# Altium PCB PCB1.PcbDoc
Units mm, origin at the board's own origin, x right, y up, seen from the top; angles counter-clockwise.
Board outline 75.6 x 66.9 mm, 2 copper layers (Top Layer, Bottom Layer); 104 components, 77 nets, 392 pads, 84 vias.
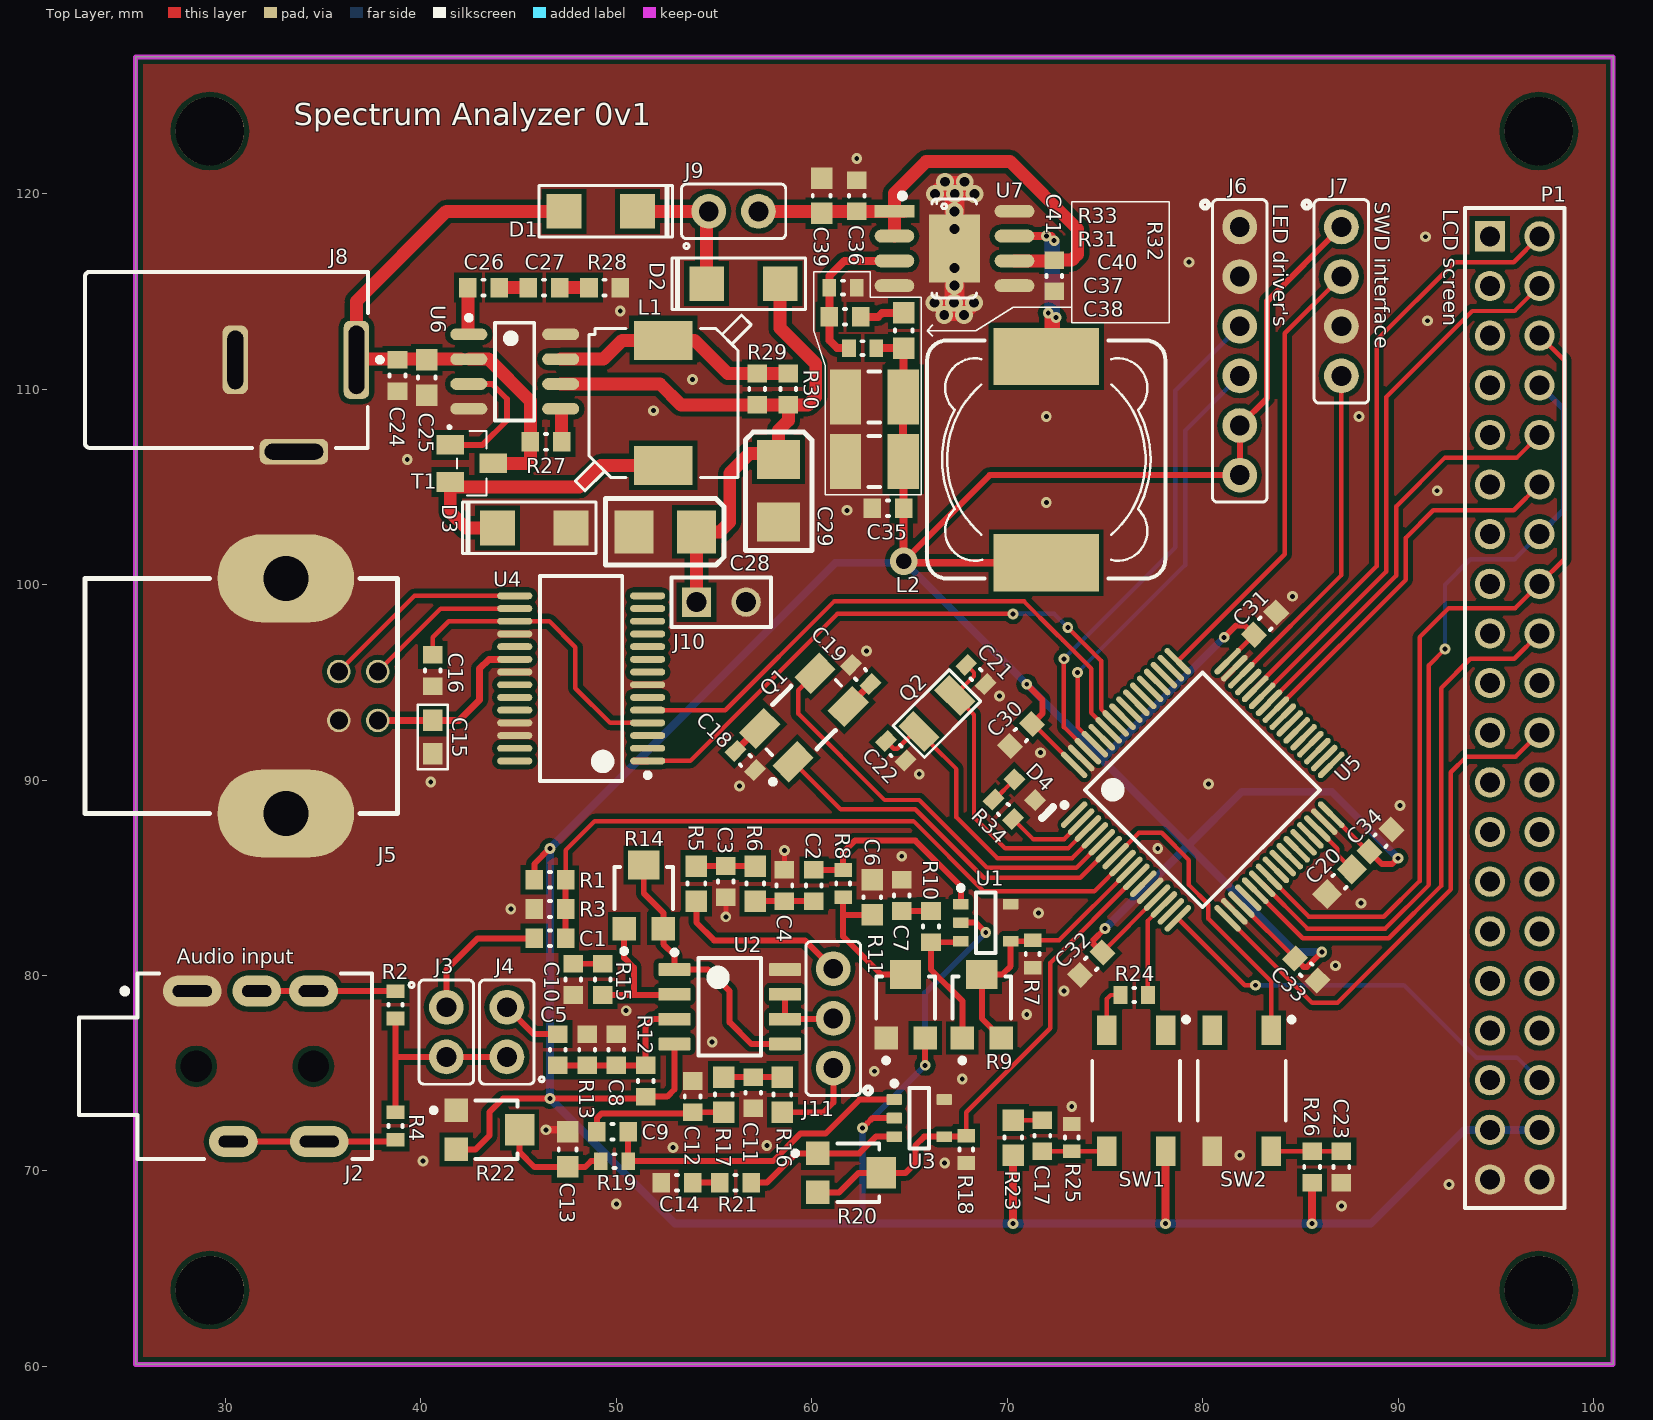
[diagram p0: Top Layer view]
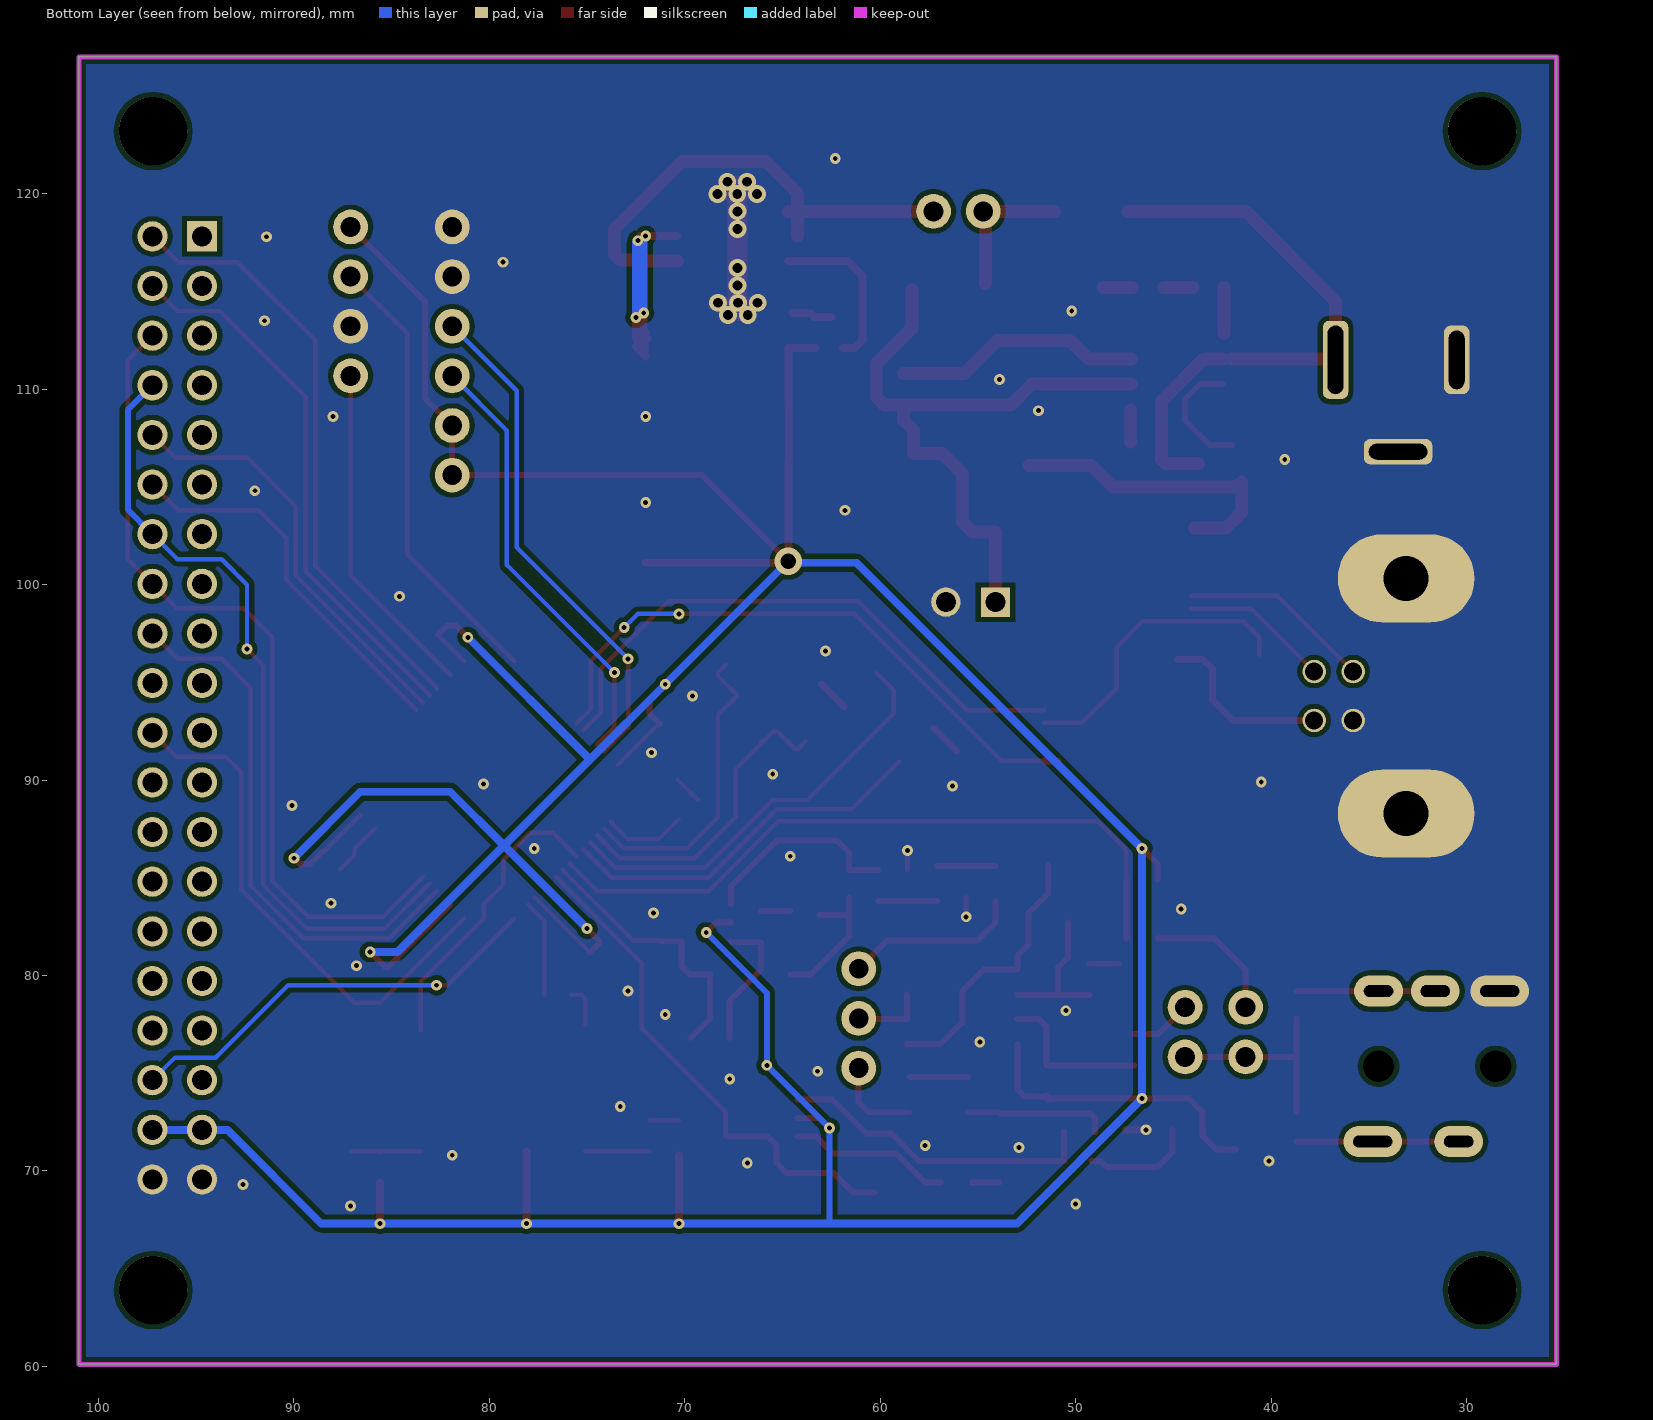
[diagram p1: Bottom Layer view, seen from below]

## Layer stack, top to bottom
Top Solder: solder mask 0.0102, Solder Resist, Dk 3.5
Top Layer: signal copper 0.0356
Dielectric 1: dielectric 0.32, FR-4, Dk 4.8
Bottom Layer: signal copper 0.0356
Bottom Solder: solder mask 0.0102, Solder Resist, Dk 3.5

## Board outline
25.4,60.1 25.4,127 99.8,127 101,127 101,60.1

## Design rules (kind name [scope] priority, off if disabled: settings)
Clearance Clearance_stm [InComponent('U5')] p1: gap=0.19
Clearance [All] p2: gap=0.25
ComponentClearance [All] p1: gap=0.5 collisioncheckmode=3 verticalgap=1 showdistances=FALSE
DiffPairsRouting [All] p1: maxlimit=0.254 minlimit=0.152 mostfreqgap=0.152 toplayer_minwidth=0.152 toplayer_maxwidth=0.356 toplayer_prefwidth=0.152 bottomlayer_minwidth=0.152 bottomlayer_maxwidth=0.356 bottomlayer_prefwidth=0.152 maxuncoupledlength=12.7
HoleSize [All] p1: absolutevalues=TRUE maxlimit=3.5 minlimit=0.25 maxpercent=80.000 minpercent=20.000
HoleToHoleClearance [All] p1: gap=0.2 allowstackedmicrovias=TRUE
MinimumSolderMaskSliver [All] p1: minsoldermaskwidth=0.1
PolygonConnect [All] p1: connectstyle=Direct reliefconductorwidth=0.254 reliefentries=4 polygonreliefangle="90 Angle" airgapwidth=0.254
RoutingVias [All] p1: holewidth=0.25 width=0.55 viastyle="Through Hole" minholewidth=0.25 minwidth=0.55 maxholewidth=1 maxwidth=2
SilkToSilkClearance [All] p1: silktosilkclearance=0
SilkToSolderMaskClearance [IsPad] p1: minsilkscreentomaskgap=0.05 clearancetoexposedcopper=TRUE
SolderMaskExpansion [All] p1: expansion=0
Width [All] p1: maxlimit=1.016 minlimit=0.203 preferedwidth=0.406
23 further rules are at their usual default settings.

## Classes and differential pairs
differential pair USB: +USB_P -USB_N

## Components (designator, comment, footprint, x,y, rotation, side; value= is the part's Value field where it differs from the comment)
C1 "CAP 680nF 25V 0603(1608)" CAPC0603(1608)100_N 46.6,81.9 r0 top
C2 "CAP 1uF 16V 0603(1608)" CAPC0603(1608)100_N 60.1,84.6 r270 top
C3 "CAP 1uF 16V 0603(1608)" CAPC0603(1608)100_N 55.6,84.8 r90 top
C4 "CAP 1uF 16V 0603(1608)" CAPC0603(1608)100_N 58.6,84.6 r270 top
C5 "CAP 100nF 25V 0603(1608)" CAPC0603(1608)100_N 47,76.2 r90 top
C6 "CAP 10uF 6.3V 0603(1608)" CAPC0603(1608)100_M 63.1,84 r270 top
C7 "CAP 1uF 16V 0603(1608)" CAPC0603(1608)100_N 64.6,84.1 r270 top
C8 "CAP 100nF 25V 0603(1608)" CAPC0603(1608)100_N 50,76.2 r90 top
C9 "CAP 1uF 16V 0603(1608)" CAPC0603(1608)100_N 49.8,72 r180 top
C10 "CAP 1uF 16V 0603(1608)" CAPC0603(1608)100_N 47.8,79.8 r90 top
C11 "CAP 1uF 16V 0603(1608)" CAPC0603(1608)100_N 57,74 r90 top
C12 "CAP 1uF 16V 0603(1608)" CAPC0603(1608)100_N 53.9,73.8 r270 top
C13 "CAP 10uF 6.3V 0603(1608)" CAPC0603(1608)100_M 47.5,71.1 r270 top
C14 "CAP 1uF 16V 0603(1608)" CAPC0603(1608)100_N 53.1,69.4 r0 top
C15 "10n" C_SMD_0603_H0.8 40.6,92.2 r90 top
C16 "CAP 100nF 25V 0603(1608)" CAPC0603(1608)100_N 40.6,95.6 r270 top
C17 "CAP 100nF 25V 0603(1608)" CAPC0603(1608)100_N 71.8,71.8 r270 top
C18 "CAP 18pF 200V 0603(1608)" CAPC0603(1608)100_L 56.6,91 r135 top
C19 "CAP 18pF 200V 0603(1608)" CAPC0603(1608)100_L 62.5,95.4 r315 top
C20 "CAP 2.2uF 25V 0603(1608)" CAPC0603(1608)100_M 87,84.8 r45 top
C21 "CAP 6pF 50V 0603(1608)" CAPC0603(1608)100_L 68.4,95.4 r315 top
C22 "CAP 6pF 50V 0603(1608)" CAPC0603(1608)100_L 64.3,91.5 r135 top
C23 "CAP 100nF 25V 0603(1608)" CAPC0603(1608)100_N 87.1,70.2 r270 top
C24 "CAP 100nF 25V 0603(1608)" CAPC0603(1608)100_N 38.8,110.7 r90 top
C25 "CAP 10uF 6.3V 0603(1608)" CAPC0603(1608)100_M 40.3,110.6 r90 top
C26 "CAP 1uF 16V 0603(1608)" CAPC0603(1608)100_N 43.2,115.2 r180 top
C27 "CAP 1uF 16V 0603(1608)" CAPC0603(1608)100_N 46.3,115.2 r180 top
C28 "TAJB106K020R" AVX-CAPC3528_V 52.5,102.7 r180 top
C29 "TAJB106K020R" AVX-CAPC3528_V 58.3,104.8 r270 top
C30 "CAP 100nF 25V 0603(1608)" CAPC0603(1608)100_N 70.7,92.3 r45 top
C31 "CAP 100nF 25V 0603(1608)" CAPC0603(1608)100_N 83.2,98 r225 top
C32 "CAP 100nF 25V 0603(1608)" CAPC0603(1608)100_N 74.3,80.6 r45 top
C33 "CAP 100nF 25V 0603(1608)" CAPC0603(1608)100_N 85.3,80.3 r135 top
C34 "CAP 100nF 25V 0603(1608)" CAPC0603(1608)100_N 89.1,86.9 r225 top
C35 "CAP 100nF 25V 0603(1608)" CAPC0603(1608)100_N 63.9,103.9 r0 top
C36 "CAP 100nF 25V 0603(1608)" CAPC0603(1608)100_N 62.3,119.9 r270 top
C37 "CAP 68uF 6.3V 1210(3225)" CAPC1210(3225)220_M 63.2,109.6 r0 top
C38 "CAP 68uF 6.3V 1210(3225)" CAPC1210(3225)220_M 63.2,106.3 r0 top
C39 "CAP 10uF 6.3V 0603(1608)" CAPC0603(1608)100_M 60.5,119.9 r270 top
C40 "CAP 10nF 16V 0603(1608)" CAPC0603(1608)100_L 62.6,112.1 r0 top
C41 "CAP 100nF 25V 0603(1608)" CAPC0603(1608)100_N 72.4,115.8 r90 top
D1 "15MQ040N" D_SMD_SMA 49.2,119.1 r0 top
D2 "15MQ040N" D_SMD_SMA 56.5,115.4 r180 top
D3 "15MQ040N" D_SMD_SMA 45.8,102.9 r180 top
D4 "HSMD-C190" AVAG-HSMX-C190_V 70.9,89.5 r315 top
J2 "TSH-3675-BE-PA66-G" TECHNIC-TSH-3675-BLUE_V 28.5,75.35 r0 top
J3 "Value" J_THT_HDR_1x2_R2.54-V 41.3,77.1 r270 top
J4 "Value" J_THT_HDR_1x2_R2.54-V 44.4,77.1 r90 top
J5 "USB-B" "UBS B" 30.8,94.3 r270 top
J6 "DS1021-1*40SF11" J_THT_HDR_1x6_R2.54-V 81.9,111.95 r270 top
J7 "Value" J_THT_HDR_1x4_R2.54-V 87.1,114.49 r270 top
J8 "KLDX-0202-A" KYCN-KLDX-0202-A_V 30.5,111.5 r180 top
J9 "Value" J_THT_HDR_1x2_R2.54-V 56,119.1 r0 top
J10 "PH2541-2-SPGRH-6-3" PH2541-2-SPGRH-6-3_V 54.1,99.1 r90 top
J11 "DS1021-1*40SF11" J_THT_HDR_1x3_R2.54-V 61.1,77.8 r90 top
L1 "10uH DER0705-10" PKG_DER0705 52.4,109.3 r90 top
L2 "10uH" PKG_DLCSS124P-100M 72,106.4 r0 top
P1 "TSW-120-24-L-D" SMTC-TSW-120-24-X-D 94.7,117.82 r270 top
Q1 "ABM3B-8.000MHZ-B2-T" ABRA-ABM3B_V 59.6,93.2 r45 top
Q2 "32.768kHz" PKG_CFPX-217 66.4,93.4 r45 top
R1 "10K 1% 0603(1608)" RESC0603(1608)_N 46.6,84.9 r180 top
R2 "22K 1% 0603(1608)" RESC0603(1608)_L 38.7,78.5 r270 top
R3 "10K 1% 0603(1608)" RESC0603(1608)_N 46.6,83.4 r0 top
R4 "22K 1% 0603(1608)" RESC0603(1608)_L 38.7,72.3 r90 top
R5 "160R 1% 0603(1608)" RESC0603(1608)_M 54.1,84.7 r90 top
R6 "160R 1% 0603(1608)" RESC0603(1608)_M 57.1,84.7 r270 top
R7 "6K81 1% 0603(1608)" RESC0603(1608)_L 71.3,81.1 r90 top
R8 "1M 1% 0603(1608)" RESC0603(1608)_L 61.6,84.7 r90 top
R9 "35WR10KLFTR" BI-35WR10KLFTR-3_V 68.7,78.4 r90 top
R10 "100K 5% 0603(1608)" RESC0603(1608)_N 66.1,82.5 r270 top
R11 "35WR10KLFTR" BI-35WR10KLFTR-3_V 64.8,78.4 r90 top
R12 "100K 5% 0603(1608)" RESC0603(1608)_N 51.5,74.6 r270 top
R13 "100K 5% 0603(1608)" RESC0603(1608)_N 48.5,76.2 r270 top
R14 "35WR10KLFTR" BI-35WR10KLFTR-3_V 51.4,84 r90 top
R15 "100K 5% 0603(1608)" RESC0603(1608)_N 49.3,79.8 r270 top
R16 "9R1 1% 0603(1608)" RESC0603(1608)_M 58.5,73.9 r90 top
R17 "9R1 1% 0603(1608)" RESC0603(1608)_M 55.5,73.9 r270 top
R18 "6K81 1% 0603(1608)" RESC0603(1608)_L 67.9,71.1 r90 top
R19 "1M 1% 0603(1608)" RESC0603(1608)_L 49.9,70.5 r0 top
R20 "35WR10KLFTR" BI-35WR10KLFTR-3_V 61.9,69.9 r0 top
R21 "100K 5% 0603(1608)" RESC0603(1608)_N 56.1,69.4 r0 top
R22 "35WR10KLFTR" BI-35WR10KLFTR-3_V 43.4,72.1 r0 top
R23 "100R 1% 0603(1608)" RESC0603(1608)_M 70.3,71.7 r270 top
R24 "330R 1% 0603(1608)" RESC0603(1608)_L 76.5,79 r180 top
R25 "220K 1% 0603(1608)" RESC0603(1608)_L 73.3,71.7 r270 top
R26 "100K 5% 0603(1608)" RESC0603(1608)_N 85.6,70.2 r270 top
R27 "10K 1% 0603(1608)" RESC0603(1608)_N 46.4,107.3 r180 top
R28 "2K 1% 0603(1608)" RESC0603(1608)_N 49.4,115.2 r180 top
R29 "10K 1% 0603(1608)" RESC0603(1608)_N 57.2,110 r270 top
R30 "10K 1% 0603(1608)" RESC0603(1608)_N 58.8,110 r270 top
R31 "100K 5% 0603(1608)" RESC0603(1608)_N 61.7,113.7 r0 top
R32 "5K1 1% 0603(1608)" RESC0603(1608)_M 64.7,113 r270 top
R33 "20K 1% 0603(1608)" RESC0603(1608)_L 61.6,115.2 r180 top
R34 "330R" RESC0603(1608)_L 69.8,88.5 r315 top
SW1 "TVCM01-038B" JNFU-TVCM01-038B_V 76.6,74.1 r270 top
SW2 "TVCM01-038B" JNFU-TVCM01-038B_V 82,74.1 r270 top
T1 "IRLML2246" SOT-23 42.6,106.2 r270 top
U1 "LM321MFX" DBV0005A_L 68.9,82.7 r0 top
U2 "LM358MX" D0008A_M 55.8,78.4 r0 top
U3 "LM321MFX" DBV0005A_L 65.5,72.7 r0 top
U4 "FT232RL-Reel" SSOP-28_L 48.2,95.2 r180 top
U5 "STM32F401RBT6" STM-LQFP64_N 80,89.5 r45 top
U6 "LTC4002ES8-4.2" LT-S8-8_L 44.8,110.9 r0 top
U7 "Value" SO8-N_THERMAL 67.3,117.2 r0 top

## Footprints (in the part's own frame and the unit in brackets; to place one, negate y for a bottom-side part, rotate by r counter-clockwise, add the part's x,y. Pads: shape width x height; smd on the part's side, far side on the other; paste and mask are expansions set on the pad)
ABRA-ABM3B_V [mm] "SMD, 4-Leads, Body 5x3.2mm"
  rect 1.8x1.2 smd: 1(-2,-1.2) 2(2,-1.2) 3(2,1.2) 4(-2,1.2)
  silkscreen extent -3.57,-1.6 2.5,1.6, body extent -2.5,-1.59 2.5,1.59, height 1.13
AVAG-HSMX-C190_V [mm] "SMD, 2-Leads, Body 1.6x0.8mm, Height 0.9mm"
  rect 0.8x0.8 smd: 1(-0.75,0) 2(0.75,0)
  silkscreen extent 1.65,-0.4 1.65,0.4, body extent -0.8,-0.4 0.8,0.4, height 0.9
AVX-CAPC3528_V [mm] "SMT Capacitor, 2 Leads, Body 3.5x2.8mm"
  rect 2x2.2 smd: 1(-1.6,0) 2(1.6,0)
  silkscreen extent -3,-1.7 3.05,1.7, body extent -1.79,-1.54 1.8,1.54, height 1.9
BI-35WR10KLFTR-3_V [mm] "SMD, 3-Leads, Body 3x3.1mm"
  rect 1.2x1.2 smd: 1(-1.6,1) 3(-1.6,-1)
  rect 1.5x1.6 smd: 2(1.65,0)
  silkscreen extent -2.87,-1.5 1.55,1.5, body extent -1.55,-1.5 1.55,1.5, height 1.8
C_SMD_0603_H0.8 [mm]
  rect 1.1x1 smd: 1(-0.85,0) 2(0.85,0)
  silkscreen extent -1.65,-0.76 1.65,0.76, body extent -0.8,-0.4 0.8,0.4, height 0.8
CAPC0603(1608)100_L [mm] "Chip Capacitor, Body 1.6x0.8mm, Height 1.0mm, IPC High Density"
  rect 0.7x0.9 smd: 1(-0.7,0) 2(0.7,0)
  silkscreen extent -0.05,-0.35 0.05,0.35, body extent -0.88,-0.47 0.88,0.48, height 1
CAPC0603(1608)100_M [mm] "Chip Capacitor, Body 1.6x0.8mm, Height 1.0mm, IPC Low Density"
  rect 1.1x1.1 smd: 1(-0.9,0) 2(0.9,0)
  silkscreen extent -0.05,-0.45 0.05,0.45, body extent -0.87,-0.47 0.88,0.48, height 1
CAPC0603(1608)100_N [mm] "Chip Capacitor, Body 1.6x0.8mm, Height 1.0mm, IPC Medium Density"
  rect 0.9x1 smd: 1(-0.8,0) 2(0.8,0)
  silkscreen extent -0.05,-0.4 0.05,0.4, body extent -0.87,-0.48 0.88,0.47, height 1
CAPC1210(3225)220_M [mm] "Chip Capacitor, Body 3.2x2.5mm, Height 2.2mm, IPC Low Density"
  rect 1.6x2.8 smd: 1(-1.475,0) 2(1.475,0)
  silkscreen extent -0.3,-1.3 0.3,1.3, body extent -1.7,-1.35 1.7,1.35, height 2.2
D0008A_M [mm] "SOIC, 8-Leads, Body 5x4mm, Pitch 1.27mm, IPC Low Density"
  rrect15% 1.65x0.65 smd: 1(-2.825,1.905) 2(-2.825,0.635) 3(-2.825,-0.635) 4(-2.825,-1.905) 5(2.825,-1.905) 6(2.825,-0.635) 7(2.825,0.635) 8(2.825,1.905)
  silkscreen extent -2.95,-2.5 1.6,2.9, body extent -3,-2.45 3,2.45, height 1.63
D_SMD_SMA [mil] "Schottky"
  rect 70x70 smd: 1(-74.07,0) 2(74.07,0)
  silkscreen extent -125,-52 144,52, body extent -100,-48 100,48, height 40
DBV0005A_L [mm] "SOT23, 5-Leads, Body 3.05x1.75mm, Pitch 0.95mm, IPC High Density"
  rrect18% 0.8x0.55 smd: 1(-1.275,0.95) 2(-1.275,0) 3(-1.275,-0.95) 4(1.275,-0.95) 5(1.275,0.95)
  silkscreen extent -1.4,-1.55 0.5,1.9, body extent -1.42,-1.46 1.42,1.46, height 1.08
J_THT_HDR_1x2_R2.54-V [mil]
  round 70 hole 40: 1(-50,0) 2(50,0)
  silkscreen extent -105,-75 105,55, body extent -100,-47 100,47, height 339
J_THT_HDR_1x3_R2.54-V [mil]
  round 70 hole 40: 1(-100,0) 2(0,0) 3(100,0)
  silkscreen extent -155,-77 155,55, body extent -150,-47 149,47, height 339
J_THT_HDR_1x4_R2.54-V [mil]
  round 70 hole 40: 1(-150,0) 2(-50,0) 3(50,0) 4(150,0)
  silkscreen extent -205,-77 205,55, body extent -200,-47 200,47, height 339
J_THT_HDR_1x6_R2.54-V [mil]
  round 70 hole 40: 1(-250,0) 2(-150,0) 3(-50,0) 4(50,0) 5(150,0) 6(250,0)
  silkscreen extent -305,-77 304,55, body extent -300,-47 300,47, height 339
JNFU-TVCM01-038B_V [mm] "Surface Mount Switch, 4.5 x 4.5 mm Body"
  rect 1.5x1 smd: 1(-3.1,1.5) 2(3.1,1.5) 3(-3.1,-1.5) 4(3.1,-1.5)
  silkscreen extent -3.77,-2.25 1.52,2.68, body extent -2.25,-2.25 2.25,2.25, height 3.8
KYCN-KLDX-0202-A_V [mm] "Power Jack, 3-Leads, Body 14.5x9mm"
  rrect50% 1.3x4 hole 0.8 slot 3.5 at 90 deg: 1(-6.2,0)
  rrect50% 1.3x3.5 hole 0.8 slot 3 at 90 deg: 2(0,0)
  rrect50% 3.5x1.3 hole 0.8 slot 3 at 0 deg: 3(-3,4.7)
  silkscreen extent -7.53,-4.5 7.7,4.5, body extent -6.8,-4.5 7.7,4.9, height 10.8
LT-S8-8_L [mm] "SOIC, 8-Leads, Body 5x4mm, Pitch 1.27mm, IPC High Density"
  oval 1.9x0.6 smd: 1(-2.35,1.905) 2(-2.35,0.635) 3(-2.35,-0.635) 4(-2.35,-1.905) 5(2.35,-1.905) 6(2.35,-0.635) 7(2.35,0.635) 8(2.35,1.905)
  silkscreen extent -2.47,-2.5 1,2.88, body extent -2,-2.5 2,2.5, height 1.76
PH2541-2-SPGRH-6-3_V [mm] "Male Header, Pitch 2.54mm, 2x1 Position, Mated Height 6mm, Tail Length 3mm"
  rect 1.5x1.5 hole 1.02: 1(0,0)
  round 1.5 hole 1.02: 2(0,-2.54)
  silkscreen extent -1.27,-3.81 1.27,1.27, body extent -1.27,-3.81 1.27,1.27, height 8.4
PKG_CFPX-217 [mm]
  rect 1.1x1.9 smd: 1(-1.3,0) 2(1.3,0)
  silkscreen extent -2.03,-1.14 2.03,1.14, body extent -1.6,-0.7 1.6,0.7, height 0.9
PKG_DER0705 [mm]
  rect 2x3 smd: 1(-3.2,0) 2(3.2,0)
  silkscreen extent -4.5,-4.5 4.5,4.5, body extent -3.8,-3.83 3.8,3.77, height 5.1
PKG_DLCSS124P-100M [mm]
  rect 5.4x2.921 smd: 1(0,5.281) 2(0,-5.281)
  silkscreen extent -6.1,-6.1 6.1,6.1, body extent -6.1,-6.1 6.1,6.1, height 4.8
RESC0603(1608)_L [mm] "Chip Resistor, Body 1.6x0.8mm, IPC High Density"
  rect 0.7x0.9 smd: 1(-0.7,0) 2(0.7,0)
  silkscreen extent -0.05,-0.35 0.05,0.35, body extent -0.85,-0.47 0.85,0.47, height 0.6
RESC0603(1608)_M [mm] "Chip Resistor, Body 1.6x0.8mm, IPC Low Density"
  rect 1.1x1.1 smd: 1(-0.9,0) 2(0.9,0)
  silkscreen extent -0.05,-0.45 0.05,0.45, body extent -0.85,-0.47 0.85,0.47, height 0.6
RESC0603(1608)_N [mm] "Chip Resistor, Body 1.6x0.8mm, IPC Medium Density"
  rect 0.9x1 smd: 1(-0.8,0) 2(0.8,0)
  silkscreen extent -0.05,-0.4 0.05,0.4, body extent -0.85,-0.47 0.85,0.47, height 0.6
SMTC-TSW-120-24-X-D [mm] ".025 SQ Post Terminal Strip Assembly, 2x20 Pins, Vertical, 2.54mm Pitch, Male"
  rect 1.55x1.55 hole 1.02: 1(0,0)
  round 1.55 hole 1.02: 2(0,2.54) 3(2.54,0) 4(2.54,2.54) 5(5.08,0) 6(5.08,2.54) 7(7.62,0) 8(7.62,2.54) 9(10.16,0) 10(10.16,2.54) 11(12.7,0) 12(12.7,2.54) 13(15.24,0) 14(15.24,2.54) 15(17.78,0) 16(17.78,2.54) 17(20.32,0) 18(20.32,2.54) 19(22.86,0) 20(22.86,2.54) 21(25.4,0) 22(25.4,2.54) 23(27.94,0) 24(27.94,2.54) 25(30.48,0) 26(30.48,2.54) 27(33.02,0) 28(33.02,2.54) 29(35.56,0) 30(35.56,2.54) 31(38.1,0) 32(38.1,2.54) 33(40.64,0) 34(40.64,2.54) 35(43.18,0) 36(43.18,2.54) 37(45.72,0) 38(45.72,2.54) 39(48.26,0) 40(48.26,2.54)
  silkscreen extent -1.46,-1.27 49.72,3.81, body extent -1.27,-1.27 49.53,3.81, height 9.27
SO8-N_THERMAL [mil]
  rect 80x26 smd: 1(-121,75)
  oval 80x26 smd: 2(-121,25) 3(-121,-25) 4(-121,-75) 5(121,-75) 6(121,-25) 7(121,25) 8(121,75)
  rect 102.36x137.8 smd: 9(0,0)
  silkscreen extent -110,-100 44,111, body extent -115,-100 114,100, height 71
SOT-23 [mm]
  rect 1x1.4 smd: 1(-0.95,-1.1) 2(0.95,-1.1) 3(0,1.1)
  silkscreen extent -1.93,-1.22 1.65,0.76, body extent -1.5,-1.36 1.5,1.14, height 0.98
SSOP-28_L [mm] "SOP, 28-Leads, Body 10.2x5.3mm, Pitch 0.65mm, IPC High Density"
  oval 1.8x0.35 smd: 1(-3.4,4.225) 2(-3.4,3.575) 3(-3.4,2.925) 4(-3.4,2.275) 5(-3.4,1.625) 6(-3.4,0.975) 7(-3.4,0.325) 8(-3.4,-0.325) 9(-3.4,-0.975) 10(-3.4,-1.625) 11(-3.4,-2.275) 12(-3.4,-2.925) 13(-3.4,-3.575) 14(-3.4,-4.225) 15(3.4,-4.225) 16(3.4,-3.575) 17(3.4,-2.925) 18(3.4,-2.275) 19(3.4,-1.625) 20(3.4,-0.975) 21(3.4,-0.325) 22(3.4,0.325) 23(3.4,0.975) 24(3.4,1.625) 25(3.4,2.275) 26(3.4,2.925) 27(3.4,3.575) 28(3.4,4.225)
  silkscreen extent -3.52,-5.25 2.1,5.25, body extent -2.8,-5.25 2.8,5.25, height 2
STM-LQFP64_N [mm] "Thin QFP, 64-Leads, Body 10x10mm, Pitch 0.5mm, IPC Medium Density"
  oval 1.8x0.3 smd: 1(-5.55,3.75) 2(-5.55,3.25) 3(-5.55,2.75) 4(-5.55,2.25) 5(-5.55,1.75) 6(-5.55,1.25) 7(-5.55,0.75) 8(-5.55,0.25) 9(-5.55,-0.25) 10(-5.55,-0.75) 11(-5.55,-1.25) 12(-5.55,-1.75) 13(-5.55,-2.25) 14(-5.55,-2.75) 15(-5.55,-3.25) 16(-5.55,-3.75) 33(5.55,-3.75) 34(5.55,-3.25) 35(5.55,-2.75) 36(5.55,-2.25) 37(5.55,-1.75) 38(5.55,-1.25) 39(5.55,-0.75) 40(5.55,-0.25) 41(5.55,0.25) 42(5.55,0.75) 43(5.55,1.25) 44(5.55,1.75) 45(5.55,2.25) 46(5.55,2.75) 47(5.55,3.25) 48(5.55,3.75)
  oval 0.3x1.8 smd: 17(-3.75,-5.55) 18(-3.25,-5.55) 19(-2.75,-5.55) 20(-2.25,-5.55) 21(-1.75,-5.55) 22(-1.25,-5.55) 23(-0.75,-5.55) 24(-0.25,-5.55) 25(0.25,-5.55) 26(0.75,-5.55) 27(1.25,-5.55) 28(1.75,-5.55) 29(2.25,-5.55) 30(2.75,-5.55) 31(3.25,-5.55) 32(3.75,-5.55) 49(3.75,5.55) 50(3.25,5.55) 51(2.75,5.55) 52(2.25,5.55) 53(1.75,5.55) 54(1.25,5.55) 55(0.75,5.55) 56(0.25,5.55) 57(-0.25,5.55) 58(-0.75,5.55) 59(-1.25,5.55) 60(-1.75,5.55) 61(-2.25,5.55) 62(-2.75,5.55) 63(-3.25,5.55) 64(-3.75,5.55)
  silkscreen extent -5.67,-4.25 4.25,4.57, body extent -5,-5 5,5, height 1.6
TECHNIC-TSH-3675-BLUE_V [mm] "3.5mm Stereo Audio Socket, Blue"
  oval 3x1.6 hole 0.6 slot 2 at 0 deg: 1(-0.2,3.85) 2(6.3,-3.85)
  oval 2.5x1.6 hole 0.6 slot 1.5 at 0 deg: 3(6,3.85) 10(1.9,-3.85) 11(3.1,3.85)
  round 1.3 hole 1.6 unplated: 12(6,0) 13(0,0)
  silkscreen extent -6,-4.75 9,4.75, body extent -6.02,-4.7 8.98,4.8, height 5
"UBS B" [mm] "USE B port, horizontal"
  round 1.2 hole 0.92 paste+0 mask+0: 1(1.25,6.995) 2(-1.25,4.995) 3(-1.25,6.995) 4(1.25,4.995)
  oval 4.5x7 hole 2.3 paste+0 mask+0: 5(-6.02,2.285) 6(6.02,2.285)
  silkscreen extent -6.02,-7.99 6.02,8.01, body extent -7.35,-8.01 7.45,8.5, height 10.6

## Part data
C1: library part CMP-1035-02722-1, "CAP 680nF 25V ±10% 0603 (1608 Metric) Thickness 1mm SMD"
C2 C3 C4 C7 C9 C10 C11 C12 C14 C26 C27: library part CMP-1035-02736-1, "CAP 1uF 16V ±5% 0603 (1608 Metric) Thickness 1mm SMD"
C5 C8 C16 C17 C23 C24 C30 C31 C32 C33 C34 C35 C36 C41: library part CMP-1035-02589-1, "CAP 100nF 25V ±20% 0603 (1608 Metric) Thickness 1mm SMD"
C6 C13 C25 C39: library part CMP-1035-02796-1, "CAP 10uF 6.3V ±10% 0603 (1608 Metric) Thickness 1mm SMD"
C15: library part C_10n_50V_10%_X7R, "Kondensator SMD 0603, 10n, 10%, 50V, X7R"
C18 C19: library part CMP-1035-00761-1, "CAP 18pF 200V ±5% 0603 (1608 Metric) Thickness 1mm SMD"
C20: library part CMP-1035-02767-1, "CAP 2.2uF 25V ±10% 0603 (1608 Metric) Thickness 1mm SMD"
C21 C22: library part CMP-1035-00393-1, "CAP 6pF 50V ±0.5pF 0603 (1608 Metric) Thickness 1mm SMD"
C28 C29: library part CMP-0279-00001-1, "Capacitor, Tantalum, 10uF 10% 20V MCCT-B (3528)"
C37 C38: library part CMP-1038-02298-1, "CAP 68uF 6.3V ±20% 1210 (3225 Metric) Thickness 2.2mm SMD"
C40: library part CMP-1035-02312-1, "CAP 10nF 16V ±20% 0603 (1608 Metric) Thickness 1mm SMD"
D1 D2 D3: library part D_15MQ040N, "Dioda Schottky SMD 15MQ040N, 3A, 40V"
D4: library part CMP-1744-00006-1, "LED Uni-Color Orange, 52 mW, 20 mA, -40 to 85 degC, 2-Pin SMD, RoHS, Tape and Reel"
J2: library part CMP-0437-00002-1, "Connector, 3.5mm Stereo Audio Socket, Blue"
J3 J4 J9: library part J_HDR_1x2_JUMPER, "Z³¹cze gold pin 1x2 na jumper"
J5: "Universal Serial Bus, Type B - 90° Receptacle (TH)"
J6: library part J_HDR_1x6, "Z³¹cze gold pin"
J7: library part J_HDR_1x4, "Z³¹cze gold pin"
J8: library part CMP-1673-00001-5, "DC Power Jack, 24 V, 3.5 A, -25 to 85 degC, 3-Pin THD, RoHS"
J10: library part CMP-0261-00001-1, "Male Header, Pitch 2.54mm, 2x1 Position, Mated Height 6mm, Tail Length 3mm"
J11: library part J_HDR_1x3, "Z³¹cze gold pin"
L1: library part L_10uH_DER0705-10, "D³awik mocy SMD DER0705-10, 10uH, 20%, 1.63A"
L2: library part L_DLCSS124P-100M, "D³awik mocy SMD CSS124P100M, 10uH, 20%, 4.5A"
P1: library part CMP-1024-00454-1
Q1: library part CMP-1688-00002-1, "Ceramic SMD Crystal, 8 MHz, +/- 20 ppm, 200 Ohm, -20 to 70 degC, 4-Pin SMD, RoHS, Tape and Reel"
Q2: library part Q_CFPX-217, "Kwarc 32.768kHz, CFPX-217"
R1 R3 R27: library part CMP-1012-00623-1, "10K 0.1W 1% 0603 (1608 Metric)  SMD"
R2 R4: library part CMP-1012-00659-1, "22K 0.1W 1% 0603 (1608 Metric)  SMD"
R5 R6: library part CMP-1012-00418-1, "160R 0.1W 1% 0603 (1608 Metric)  SMD"
R7 R18: library part CMP-1012-00605-1, "6K81 0.1W 1% 0603 (1608 Metric)  SMD"
R8 R19: library part CMP-1012-00849-1, "1M 0.1W 1% 0603 (1608 Metric)  SMD"
R9 R11 R14 R20 R22: library part CMP-1745-00001-1, "3 mm Single-Turn Open Frame Surface Mount Cermet Trimming Potentiometer, +/- 25%, 35 W, -40 to 125 degC, 3-Pin SMD, RoHS, Tape and Reel"
R10 R12 R13 R15 R21 R26 R31: library part CMP-1012-00122-1, "100K 0.1W 5% 0603 (1608 Metric)  SMD"
R16 R17: library part CMP-1012-00280-1, "9R1 0.1W 1% 0603 (1608 Metric)  SMD"
R23: library part CMP-1012-00397-1, "100R 0.1W 1% 0603 (1608 Metric)  SMD"
R24 R34: library part CMP-1012-00454-1, "330R 0.1W 1% 0603 (1608 Metric)  SMD"
R25: library part CMP-1012-00772-1, "220K 0.1W 1% 0603 (1608 Metric)  SMD"
R28: library part CMP-1012-00542-1, "2K 0.1W 1% 0603 (1608 Metric)  SMD"
R29 R30: library part CMP-1012-00623-1, "0R1 0.1W 1% 0603 (1608 Metric)  SMD"
R32: library part CMP-1012-00590-1, "5K1 0.1W 1% 0603 (1608 Metric)  SMD"
R33: library part CMP-1012-00655-1, "20K 0.1W 1% 0603 (1608 Metric)  SMD"
SW1 SW2: library part CMP-0224-00001-1, "Switch, Push Button, 50 mA, 12V DC, SMD"
T1: library part T_IRLML2246TRPbF, "Tranzystor unipolarny P-MOSFET, HEXFET, -2.6A, -20V"
U1 U3: library part CMP-0055-01337-3, "Low Power Single Op Amp, 5-pin SOT-23"
U2: library part CMP-0055-00630-3, "Low Power Dual Operational Amplifier, 8-pin Narrow SOIC"
U4: library part CMP-0078-00029-3, "USB UART Asynchronous Serial Data Transfer Chip, 28-pin SSOP, Tape and Reel"
U5: library part CMP-0243-00094-2, "ARM Cortex-M4 32-bit MCU+FPU, 105 DMIPS, 128 kB Flash, 64 kB Internal RAM, 48 I/Os, 64-pin LQFP, -40 to 85 degC, Tray"
U6: library part CMP-0471-00510-1, "Standalone Li-Ion Switch Mode Battery Charger, 4.7 to 22 V Vin, 8-pin SOIC (S8-8), -40 to 85 degC"
U7: library part U_ST1S10PHR, "Przetwornica step-down synchroniczna, 3 A, 900 kHz"

## Free pads (board coordinates)
  round 3.5 hole 3.5: 0(29.2,63.9) 0(29.2,123.2) 0(97.2,63.9) 0(97.2,123.2)

## Via types
v1: diameter 0.55, hole 0.25, Top Layer to Bottom Layer, 69 vias
v2: diameter 0.914, hole 0.508, Top Layer to Bottom Layer, 14 vias
v3: diameter 1.4, hole 0.8, Top Layer to Bottom Layer, 1 vias

## Nets (pads, with @x,y where several pads share a name; then routed paths per layer and width w, separated by ;. In a path a pad name is that pad's centre, name@x,y a point inside that pad or via, vN(x,y) a via of type N, cw(c..) or ccw(c..) an arc to the next point about the centre after c; other vN are vias at no path point)
5V: C15.2 J5.1 U4.20 | length 9.2
  Top Layer w0.356: J5.1 C15.2 ; C15.2 41.95,93.05 43,94.1 43,95.7 43.475,96.175 U4.20
AUDIO_1: C1.2 R1.1 R3.2 U5.8 | length 35.7
  Top Layer w0.229: R1.1 47.4,86.4 48.9,87.9 65.2,87.9 68.8,84.3 74.446,84.3 U5.8
  Top Layer w0.305: C1.2 R3.2 R1.1
AUDIO_2: R7.2 R9.2 R9.3 U1.4 U5.9 | length 14.1
  Top Layer w0.229: R7.2 72.654,81.8 U5.9 U5.9@76.252,85.369
  Top Layer w0.305: R9.3 68.7,77.8 R9.2 69.75,80.05 70.175,80.475 U1.4 R7.2@71.25,81.75
AUDIO_3: R18.2 R20.2 R20.3 U3.4 U5.10 | length 26.2
  Top Layer w0.229: R18.2 67.9,73 72.2,77.3 72.2,80.639 U5.10
  Top Layer w0.305: R20.3 61.4,68.9 62.4,69.9 R20.2 64.8,69.9 65.3,70.4 65.3,71.3 65.75,71.75 U3.4 67.85,71.75 R18.2
GND: C3.1 C4.1 C6.1 C7.1 C8.2 C10.1 C11.1 C12.1 C13.1 C14.1 C15.1 C16.2 C18.1 C19.1 C20.1 C21.2 C22.1 C23.2 C24.1 C25.1 C28.2 C29.2 C30.1 C31.1 C32.1 C33.1 C34.1 C35.1 C36.1 C37.1 C38.1 C39.1 C41.1 D3.1 D4.2 J2.1 J5.4 J5.5 J5.6 J6.1 J6.2 J7.3 J8.2 J8.3 J10.2 P1.39 P1.40 R3.1 R7.1 R11.1 R13.1 R18.1 R22.1 R25.1 R28.1 R33.1 SW2.4 U1.5 U2.8 U3.5 U4.7 U4.18 U4.21 U4.25 U4.26 U5.12 U5.18 U5.31 U5.47 U5.63 U6.4 U6.8 U7.4 U7.5 U7.8 U7.9 | length 18.2
  Top Layer w0.229: C13.1@47.4,72.1 C13.1
  Top Layer w0.254: v1(55.6,83) C3.1 ; C4.1 v1(58.6,86.4)
  Top Layer w0.305: v2(67.284,114.421) v2@67.3,114.438 ; v2@67.3,119.962 v2@67.316,119.978
  Top Layer w0.381: v1(46.4,72.1) C13.1@47.4,72.1
  Top Layer w0.61: v2@66.792,120.629 v2(66.808,120.613) ; v2@67.808,113.771 v2(67.792,113.787) ; v2(66.808,120.613) v2(67.824,120.613) 67.824,120.486 v2(68.332,119.978) 67.316,119.978 v2(66.3,119.978) 66.3,120.105 v2(66.808,120.613) ; v2(67.792,113.787) v2(66.776,113.787) 66.776,113.914 v2(66.268,114.422) v2(67.284,114.421) v2(68.3,114.422) 68.3,114.295 v2(67.792,113.787)
  Top Layer w1.016: v2@67.3,114.438 U7.9 v2@67.3,119.962
  other v1: 87.1,68.2 50,68.3 92.6,69.3 66.8,70.4 40.1,70.5 81.9,70.8 52.9,71.2 57.7,71.3 73.3,73.3 67.7,74.7 63.2,75.1 54.9,76.6 71,78 50.5,78.2 72.9,79.2 86.8,80.5 71.6,83.2 44.6,83.4 88.1,83.7 64.6,86.1 77.7,86.5 90.1,88.7 56.3,89.7 80.3,89.8 40.5,89.9 65.5,90.3 71.7,91.4 69.6,94.3 62.8,96.6 84.6,99.4 61.8,103.8 72,104.2 92,104.8 39.3,106.4 72,108.6 88,108.6 51.9,108.9 53.9,110.5 91.5,113.5 50.2,114 79.3,116.5 91.4,117.8 62.3,121.8
  other v2: 67.3,115.301 67.3,116.201 67.3,118.201 67.3,119.101 67.316,119.979
LCD_CS: P1.4 U5.43 | length 28.1
  Top Layer w0.229: U5.43 89.4,100.668 89.4,109.6 93.8,114 95.96,114 P1.4
LCD_PWM: P1.36 U5.16 | length 21.9
  Top Layer w0.229: U5.16 82.151,79.5 v1(82.7,79.5)
  Bottom Layer w0.229: v1(82.7,79.5) 90.3,79.5 94,75.8 96.08,75.8 P1.36
LCD_RS: P1.2 U5.44 | length 31
  Top Layer w0.229: U5.44 82.687,94.727 88.9,100.94 88.9,112.5 92.9,116.5 95.92,116.5 P1.2
LCD_RST: P1.10 U5.42 | length 21.6
  Top Layer w0.229: U5.42 89.9,100.461 89.9,104 92.4,106.5 96.08,106.5 P1.10
LCD_T_CS: P1.18 U5.21 | length 28
  Top Layer w0.229: U5.21 85.125,81.9 89.523,81.9 92.2,84.577 92.2,94.7 93.7,96.2 95.94,96.2 P1.18
LCD_T_DCLK: P1.6 P1.16 U5.23 | length 42.8
  Top Layer w0.229: U5.23 85.439,83 89.269,83 91.1,84.831 91.1,97.3 92.6,98.8 96,98.8 P1.16 98.5,101.3 98.5,111.48 P1.6
LCD_T_DIN: P1.8 P1.14 U5.22 | length 40.7
  Top Layer w0.229: U5.22 83.071,84.692 85.363,82.4 89.346,82.4 91.579,84.632 91.579,95.879 v1(92.4,96.7)
  Bottom Layer w0.229: v1(92.4,96.7) 92.4,100 93.7,101.3 95.96,101.3 P1.14
  Bottom Layer w0.305: P1.14 98.5,103.84 98.5,108.94 P1.8
LCD_T_DOUT: P1.12 U5.41 | length 19.5
  Top Layer w0.229: U5.41 90.4,100.254 90.4,102.4 91.8,103.8 95.92,103.8 P1.12
LCD_T_IRQ: P1.22 U5.17 | length 27
  Top Layer w0.229: U5.17 85.597,78.6 86.9,78.6 92.7,84.4 92.7,90.4 93.5,91.2 96.02,91.2 P1.22
LED_SCL: J6.4 U5.61 | length 22.7
  Top Layer w0.229: v1(73.6,95.5) 73.6,92.718 U5.61
  Bottom Layer w0.229: v1(73.6,95.5) 79.1,101 79.1,107.88 J6.4
LED_SDA: J6.3 U5.62 | length 26
  Top Layer w0.229: v1(72.9,96.2) 72.9,92.711 U5.62
  Bottom Layer w0.229: v1(72.9,96.2) 78.6,101.9 78.6,109.92 J6.3
NetC1_1: C1.1 J3.1 | length 7.1
  Top Layer w0.305: J3.1 41.3,80.3 42.9,81.9 C1.1
NetC2_1: C2.1 R8.2 U1.1 | length 10.6
  Top Layer w0.305: C2.1 R8.2 61.6,86.3 62.2,86.9 65.3,86.9 67.625,84.575 U1.1
NetC2_2: C2.2 C4.2 R6.2 | length 3
  Top Layer w0.305: R6.2 C4.2 C2.2
NetC3_2: C3.2 R5.2 R6.1 | length 3
  Top Layer w0.305: R5.2 C3.2 R6.1
NetC5_1: C5.1 C8.1 R12.1 R13.2 U2.3 | length 8.1
  Top Layer w0.305: C5.1 R13.2 C8.1 R12.1 51.5,77.4 51.865,77.765 U2.3
NetC5_2: C5.2 J4.2 | length 3.2
  Top Layer w0.305: J4.2 45.77,77 C5.2
NetC6_2: C6.2 R8.1 R11.2 | length 7.3
  Top Layer w0.305: R8.1 61.6,83.1 ; C6.2 61.6,83.1 ; R11.2@64.6,80.05 63.55,80.05 61.6,82 61.6,83.1
NetC7_2: C7.2 R10.1 | length 1.5
  Top Layer w0.305: C7.2 R10.1
NetC9_1: C9.1 R19.2 U3.1 | length 16.4
  Top Layer w0.305: C9.1 R19.2 58.015,70.5 59.418,71.902 60.702,71.902 62.45,73.65 U3.1
NetC9_2: C9.2 C12.2 R17.2 | length 7.4
  Top Layer w0.305: C9.2 49,72.7 49.248,72.948 53.9,72.948 C12.2 R17.2
NetC10_2: C10.2 R15.1 | length 1.5
  Top Layer w0.305: C10.2 R15.1
NetC11_2: C11.2 R16.2 R17.1 | length 3
  Top Layer w0.305: R17.1 C11.2 R16.2
NetC13_2: C13.2 R19.1 R22.2 | length 5.7
  Top Layer w0.305: R22.2 45.05,70.95 45.8,70.2 C13.2 48.4,70.2 48.7,70.5 R19.1
NetC14_2: C14.2 R21.1 | length 1.4
  Top Layer w0.305: C14.2 R21.1
NetC16_1: C16.1 U4.4 U4.17 | length 15.6
  Top Layer w0.229: C16.1 40.6,97.3 41.425,98.125 U4.17 46.575,98.125 47.9,96.8 47.9,94.7 49.675,92.925 U4.4
NetC17_1: C17.1 R23.1 | length 1.5
  Top Layer w0.229: R23.1 C17.1
NetC17_2: C17.2 R25.2 SW1.4 | length 3.3
  Top Layer w0.229: C17.2 R25.2 ; R25.2 SW1.4
NetC18_2: C18.2 Q1.4 | length 1.7
  Top Layer w0.229: Q1.4@57.244,92.634 Q1.4
  Top Layer w0.356: C18.2 Q1.4@57.244,92.634
NetC19_2: C19.2 Q1.2 | length 1.6
  Top Layer w0.229: Q1.2 Q1.2@61.863,93.773
  Top Layer w0.356: Q1.2@61.863,93.773 C19.2
NetC20_2: C20.2 U5.30 | length 2.8
  Top Layer w0.229: U5.30 86.9,86.489 86.9,86.173 C20.2
NetC21_1: C21.1 Q2.2 U5.3 | length 15.7
  Top Layer w0.229: C21.1 68.3,95.5 68.3,95.32 67.319,94.339 Q2.2 68.3,93.338 68.3,88.1 69.9,86.5 73.111,86.5 U5.3
NetC22_2: C22.2 Q2.1 U5.4 | length 15.9
  Top Layer w0.229: C22.2 64.2,91.6 64.38,91.6 65.261,92.481 Q2.1 Q2.1@66.1,91.862 ; Q2.1@66.1,91.962 Q2.1@66.1,91.862 ; U5.4 73.318,86 69.5,86 67.4,88.1 67.4,90.562 Q2.1@66.1,91.862
NetC23_1: C23.1 R26.1 SW2.2 | length 3.6
  Top Layer w0.229: SW2.2 R26.1 ; R26.1 C23.1
NetC26_1: C26.1 C27.2 | length 1.5
  Top Layer w0.66: C26.1 C27.2
NetC26_2: C26.2 U6.1 | length 2.4
  Top Layer w0.305: U6.1@42.4,112.855 U6.1
  Top Layer w0.66: U6.1@42.4,112.855 C26.2
NetC27_1: C27.1 R28.2 | length 1.5
  Top Layer w0.66: C27.1 R28.2
NetC28_1: C28.1 C29.1 D2.1 J10.1 R29.2 R30.2 U6.6 | length 33.5
  Top Layer w0.66: U6.6 52.235,110.265 53.3,109.2 R29.2 R30.2 ; J10.1 C28.1 55.3,102.7 55.8,103.2 55.8,105.7 56.8,106.7 58.3,106.7 58.3,107.9 58.8,108.4 R30.2 ; D2.1@58.381,115.1 58.381,113.119 60.2,111.3 60.2,109.6 59.8,109.2 R30.2
NetC36_2: C36.2 C39.2 C41.2 J9.2 U7.1 U7.2 U7.6 | length 25.7
  Top Layer w0.305: U7.1@64.222,119.1 U7.1
  Top Layer w0.66: J9.2 64.222,119.1 U7.1@64.227,119.1 ; U7.2 U7.1@64.227,119.1 ; U7.1@64.722,119.1 U7.1@64.227,119.1 ; U7.6 C41.2@72.365,116.565 ; C41.2 73.3,116.6 73.6,116.9 73.6,118.2 70.15,121.65 65.85,121.65 64.227,120.027 U7.1 U7.1@64.227,119.1
NetC40_1: C40.1 R31.1 R33.2 U7.3 | length 8.5
  Top Layer w0.406: R33.2 R31.1 60.9,112.5 61.3,112.1 C40.1 ; R33.2@60.9,115.3 60.9,115.8 61.665,116.565 U7.3 U7.3@64.727,116.565
NetD1_2: D1.2 D2.2 J9.1 | length 7.2
  Top Layer w0.305: J9.1@54.719,119.089 J9.1
  Top Layer w0.66: D1.2 J9.1 ; D2.2 J9.1@54.619,118.889
NetD3_2: D3.2 L1.1 T1.2 | length 15.8
  Top Layer w0.66: D3.2 42.3,102.9 41.5,103.7 T1.2 41.75,105 48.1,105 49.2,106.1 L1.1
NetD4_1: D4.1 R34.1 | length 1.5
  Top Layer w0.229: R34.1@69.334,88.995 D4.1
NetJ2_2: J2.2 J2.10 R4.1 | length 8.3
  Top Layer w0.305: J2.10 J2.2 R4.1@38.7,71.5
NetJ2_3: J2.3 J2.11 R2.1 | length 7.1
  Top Layer w0.305: J2.11 J2.3 R2.1
NetJ3_2: J3.2 J4.1 R2.2 R4.2 | length 10.5
  Top Layer w0.305: R4.2 R2.2 ; 38.73,75.83 J3.2 J4.1
NetJ11_1: J11.1 R16.1 | length 4.6
  Top Layer w0.305: R16.1 60.6,73 61.1,73.5 J11.1
NetJ11_2: J11.2 U2.6 U2.7 | length 3.8
  Top Layer w0.305: U2.7 U2.6 61.065,77.765 J11.2
NetJ11_3: J11.3 R5.1 | length 9.1
  Top Layer w0.305: R5.1 54.1,82.7 55,81.8 59.64,81.8 J11.3
NetL1_2: L1.2 R29.1 R30.1 U6.7 | length 12.8
  Top Layer w0.66: U6.7 49.335,111.535 50.3,112.5 L1.2 54,112.5 55.7,110.8 R29.1 R30.1
NetL2_1: L2.1 U7.7 | length 16
  Top Layer w0.305: L2.1 L2.1@72,112.4
  Top Layer w0.406: U7.7 v1(72,117.835) 72.265,117.835 v1(72.4,117.6) ; L2.1@71.9,112.6 L2.1@72,112.5 ; L2.1 L2.1@72.2,111.881 ; v1(72.1,113.9) 72.1,113.001 72,112.901 L2.1@72.2,112.701 ; L2.1@72.2,112.7 L2.1@72,112.5 ; L2.1@72.3,112.6 L2.1@72.4,112.5 ; L2.1@72.5,112.181 L2.1@72.4,112.081 ; v1(72.5,113.665) 72.5,112.6 L2.1@72.4,112.5 ; L2.1@72,112.5 L2.1@72.2,112.3 ; L2.1@72.2,111.881 L2.1@72.4,112.081 ; L2.1@72.2,111.881 L2.1@72.2,112.3 ; L2.1@72.2,112.3 L2.1@72.4,112.5 ; L2.1@72.4,112.081 L2.1@72.4,112.5
  Bottom Layer w0.406: v1(72,117.835) v1@72.1,117.735 ; v1(72.1,113.9) v1@72.1,117.735 ; v1@72.2,117.635 v1@72.1,117.735 ; v1(72.4,117.6) 72.5,117.5 v1@72.5,113.8
NetQ1_1: Q1.1 U5.6 | length 19.2
  Top Layer w0.229: Q1.1 61.472,88.5 65.3,88.5 68.8,85 73.732,85 U5.6
NetQ1_3: Q1.3 U5.5 | length 21.8
  Top Layer w0.229: Q1.3 59.3,94.597 59.3,93.4 63.721,88.979 65.498,88.979 68.977,85.5 73.525,85.5 U5.5
NetR9_1: R9.1 R10.2 U1.3 | length 7.1
  Top Layer w0.305: U1.3 67.575,81.7 R10.2 66.1,80.3 67.7,78.7 R9.1
NetR14_1: R14.1 R15.2 U2.2 | length 7.6
  Top Layer w0.305: R15.2 50.9,79 ; R14.1@50.4,82.7 R14.1 50.4,80.9 50.9,80.4 50.9,79 ; U2.2 52.94,79 50.9,79
NetR14_2: R14.2 R14.3 U2.1 U2.5 | length 14.2
  Top Layer w0.305: R14.2 51.4,84.2 52.4,83.2 R14.3 52.4,81.6 52.975,81.025 U2.1 54.695,80.305 55.8,79.2 55.8,77.6 56.905,76.495 U2.5
NetR20_1: R20.1 R21.2 U3.3 | length 8.3
  Top Layer w0.305: R21.2 57.7,69.4 59.2,70.9 R20.1 62.431,70.9 63.281,71.75 U3.3
NetR24_2: R24.2 SW1.3 | length 2.1
  Top Layer w0.229: SW1.3@75.1,77.5 75.1,78.8 75.3,79 R24.2
NetR27_1: R27.1 U6.5 | length 1.7
  Top Layer w0.305: U6.5 U6.5@47.2,108.945
  Top Layer w0.66: R27.1 U6.5@47.2,108.945
NetR31_2: R31.2 R32.1 | length 2.1
  Top Layer w0.406: R31.2 63.4,113.7 63.6,113.9 R32.1@64.5,113.9
NetR34_2: R34.2 U5.2 | length 4.3
  Top Layer w0.229: R34.2 71.321,86.979 72.913,86.979 73.713,87.779 73.713,87.874 U5.2
NetT1_1: T1.1 U6.3 | length 6.3
  Top Layer w0.305: T1.1@42,107.15 43.15,107.15 44.4,108.4 44.4,109.5 43.635,110.265 U6.3
RESET_BUTTON: SW2.1 U5.7 | length 15.3
  Top Layer w0.229: U5.7 76.739,87.3 77.9,87.3 79.3,85.9 79.3,84.631 80.288,83.642 80.288,82.912 83.5,79.7 SW2.1
SWD_CLK: J7.2 U5.49 | length 23.2
  Top Layer w0.229: U5.49 84.2,101.549 84.2,112.86 J7.2
SWD_DIO: J7.4 U5.46 | length 17.4
  Top Layer w0.229: U5.46 87.1,100.489 J7.4
USB_N: J5.3 U4.16 | length 7.6
  Top Layer w0.229: J5.3 41.02,98.775 U4.16@44.1,98.775
USB_P: J5.2 U4.15 | length 9.9
  Top Layer w0.229: J5.2 39.67,99.425 U4.15@44.1,99.425
USB_RXB: U4.5 U5.59 | length 30
  Top Layer w0.229: U4.5 55.575,93.575 61.139,99.139 70.861,99.139 72.461,97.539 72.461,97.535 72.835,97.161 72.843,97.161 74.3,95.704 74.3,93.432 U5.59
USB_TXD: U4.1 U5.58 | length 31.5
  Top Layer w0.229: U4.1 53.775,90.975 61.3,98.5 v1(70.3,98.5) ; v1(73.1,97.8) 74.8,96.1 74.8,93.639 U5.58
  Top Layer w0.356: U4.1@50.9,90.975 U4.1
  Bottom Layer w0.229: v1(70.3,98.5) 72.4,98.5 v1(73.1,97.8)
VCC: C30.2 C31.2 C32.2 C33.2 C34.2 C35.2 C37.2 C38.2 C40.2 J6.5 J6.6 J7.1 L2.2 P1.37 P1.38 R1.2 R11.3 R12.2 R22.3 R23.2 R26.2 R32.2 SW1.2 U1.2 U2.4 U3.2 U5.13 U5.19 U5.32 U5.48 U5.64 | length 277.7
  Top Layer w0.229: C30.2 71.331,92.866 U5.64 ; C32.2@74.857,81.175 U5.13 ; U5.48 81.276,96.076 C31.2 ; U5.19 81.98,83.62 C33.2 ; U5.32 86.576,88.224 C34.2@88.5,86.3
  Top Layer w0.305: R22.3 42.8,71.1 43.5,71.8 43.5,73 44.2,73.7 v1(46.6,73.7) R12.2@51.4,73.7 ; R1.2 45.8,85.7 v1(46.6,86.5) ; R12.2 52.6,73.8 52.975,74.175 U2.4 ; v1(62.6,72.2) 62.85,72.45 63.1,72.7 U3.2 ; C38.2 C38.2@64.7,106.275 ; v3(64.7,101.2) 69.1,105.6 J6.6 J6.5 83.3,109.54 83.3,114.5 J7.1 ; v1(65.8,75.4) R11.3 ; U1.2 68.4,82.7 v1(68.9,82.2) ; v1(71,94.9) 71.8,94.1 71.8,93.4 C30.2 ; C32.2 74.857,81.175 74.4,81.631 74.4,81.8 v1(75,82.4) ; v1(81.1,97.3) 81.7,97.9 82.169,97.9 C31.2 ; C33.2 85.163,80.437 85.337,80.437 v1(86.1,81.2) ; C34.2 89.169,85.7 89.7,85.7 v1(90,86)
  Top Layer w0.406: R12.2@51.4,73.7 R12.2 ; C40.2 R32.2@64.5,112.1 ; C38.2 C37.2@64.675,109 ; C38.2@64.7,106.275 C35.2 v3(64.7,101.2) 64.7,101.119 L2.2 ; C37.2@64.7,109.175 R32.2 ; v1(70.3,67.3) R23.2 ; v1(78.1,67.3) SW1.2 ; v1(85.6,67.3) R26.2
  Bottom Layer w0.305: 62.6,67.3 v1(62.6,72.2) v1(65.8,75.4) 65.8,79.1 v1(68.9,82.2)
  Bottom Layer w0.406: v3@64.7,101.119 61.219,101.119 v1(46.6,86.5) v1(46.6,73.7) 53,67.3 62.6,67.3 v1(70.3,67.3) v1(78.1,67.3) v1(85.6,67.3) 88.6,67.3 93.4,72.1 P1.37 P1.38 ; v3(64.7,101.2) v1(71,94.9) 74.85,91.05 ; v1(75,82.4) 79.25,86.65 ; v1(81.1,97.3) 74.85,91.05 ; v1(86.1,81.2) 84.7,81.2 79.25,86.65 ; v1(90,86) 86.6,89.4 82,89.4 79.25,86.65 ; 74.85,91.05 79.25,86.65
VIN: C24.2 C25.2 D1.1 J8.1 R27.2 T1.3 U6.2 | length 30.1
  Top Layer w0.305: J8.1 J8.1@36.735,111.535 ; 36.7,114.4 36.7,114.5
  Top Layer w0.66: J8.1 36.7,114.4 ; 36.7,114.5 41.3,119.1 D1.1 ; J8.1@36.735,111.535 U6.2@42.05,111.535 ; U6.2@42.6,111.535 U6.2 43.465,111.535 45.6,109.4 R27.2 45.6,106.4 45.4,106.2 T1.3
WAKEUP_BUTTON: R24.1 U5.14 | length 5
  Top Layer w0.229: R24.1 77.2,82.811 U5.14
pads on no net: J2.12 J2.13 P1.1 P1.3 P1.5 P1.7 P1.9 P1.11 P1.13 P1.15 P1.17 P1.19 P1.20 P1.21 P1.23 P1.24 P1.25 P1.26 P1.27 P1.28 P1.29 P1.30 P1.31 P1.32 P1.33 P1.34 P1.35 SW1.1 SW2.3 U4.2 U4.3 U4.6 U4.8 U4.9 U4.10 U4.11 U4.12 U4.13 U4.14 U4.19 U4.22 U4.23 U4.24 U4.27 U4.28 U5.1 U5.11 U5.15 U5.20 U5.24 U5.25 U5.26 U5.27 U5.28 U5.29 U5.33 U5.34 U5.35 U5.36 U5.37 U5.38 U5.39 U5.40 U5.45 U5.50 U5.51 U5.52 U5.53 U5.54 U5.55 U5.56 U5.57 U5.60

## Polygon pours and split planes (outlines as drawn)
GND on Top Layer "TOP GND" (solid, remove dead copper, pour order 2): 25.4,60.1 25.4,127 99.8,127 101,127 101,60.1
GND on Bottom Layer "BOT GND" (solid, remove dead copper, pour order 3): 25.4,60.1 25.4,127 99.8,127 101,127 101,60.1

## Keep-outs
Keep-Out Layer:
  lines w0.254: 99.8,127 99.8,127 ; 99.8,127 25.4,127 25.4,60.1 31.4,60.1 99.8,60.1 101,60.1 101,127 99.8,127

## Silkscreen, mask and mechanical layers (free items; w line width, h text height)
Top Overlay:
  lines w0.076: 66.2,112.7 65.9,113 ; 66.2,113.3 65.9,113 ; 65.9,113 66.7,113 68.4,113 70.3,114.2 73.3,114.2 ; 73.3,114.2 73.3,119.6 78.3,119.6 78.3,113.4 73.3,113.4 73.3,114.2 ; 60.1,113 60.1,116 63,116 63,114.7 65.6,114.7 65.6,114.3 65.6,104.6 60.7,104.6 60.7,111.2 60.1,113
  text "Spectrum Analyzer 0v1" at 33.5,123.5 h1.14
  text "SWD interface" at 88.8,119.6 h0.76 r270
  text "LED driver's" at 83.6,119.5 h0.76 r270
  text "LCD screen" at 92.3,119.2 h0.76 r270
  text "Audio input" at 27.5,80.6 h0.76